# Altium PCB Photogate.PcbDoc
Units mm, origin at the board's own origin, x right, y up, seen from the top; angles counter-clockwise.
Board outline 30.5 x 39.25 mm, 2 copper layers (Top Layer, Bottom Layer), stack 1.621 mm thick; 52 components, 21 nets, 131 pads, 40 vias.
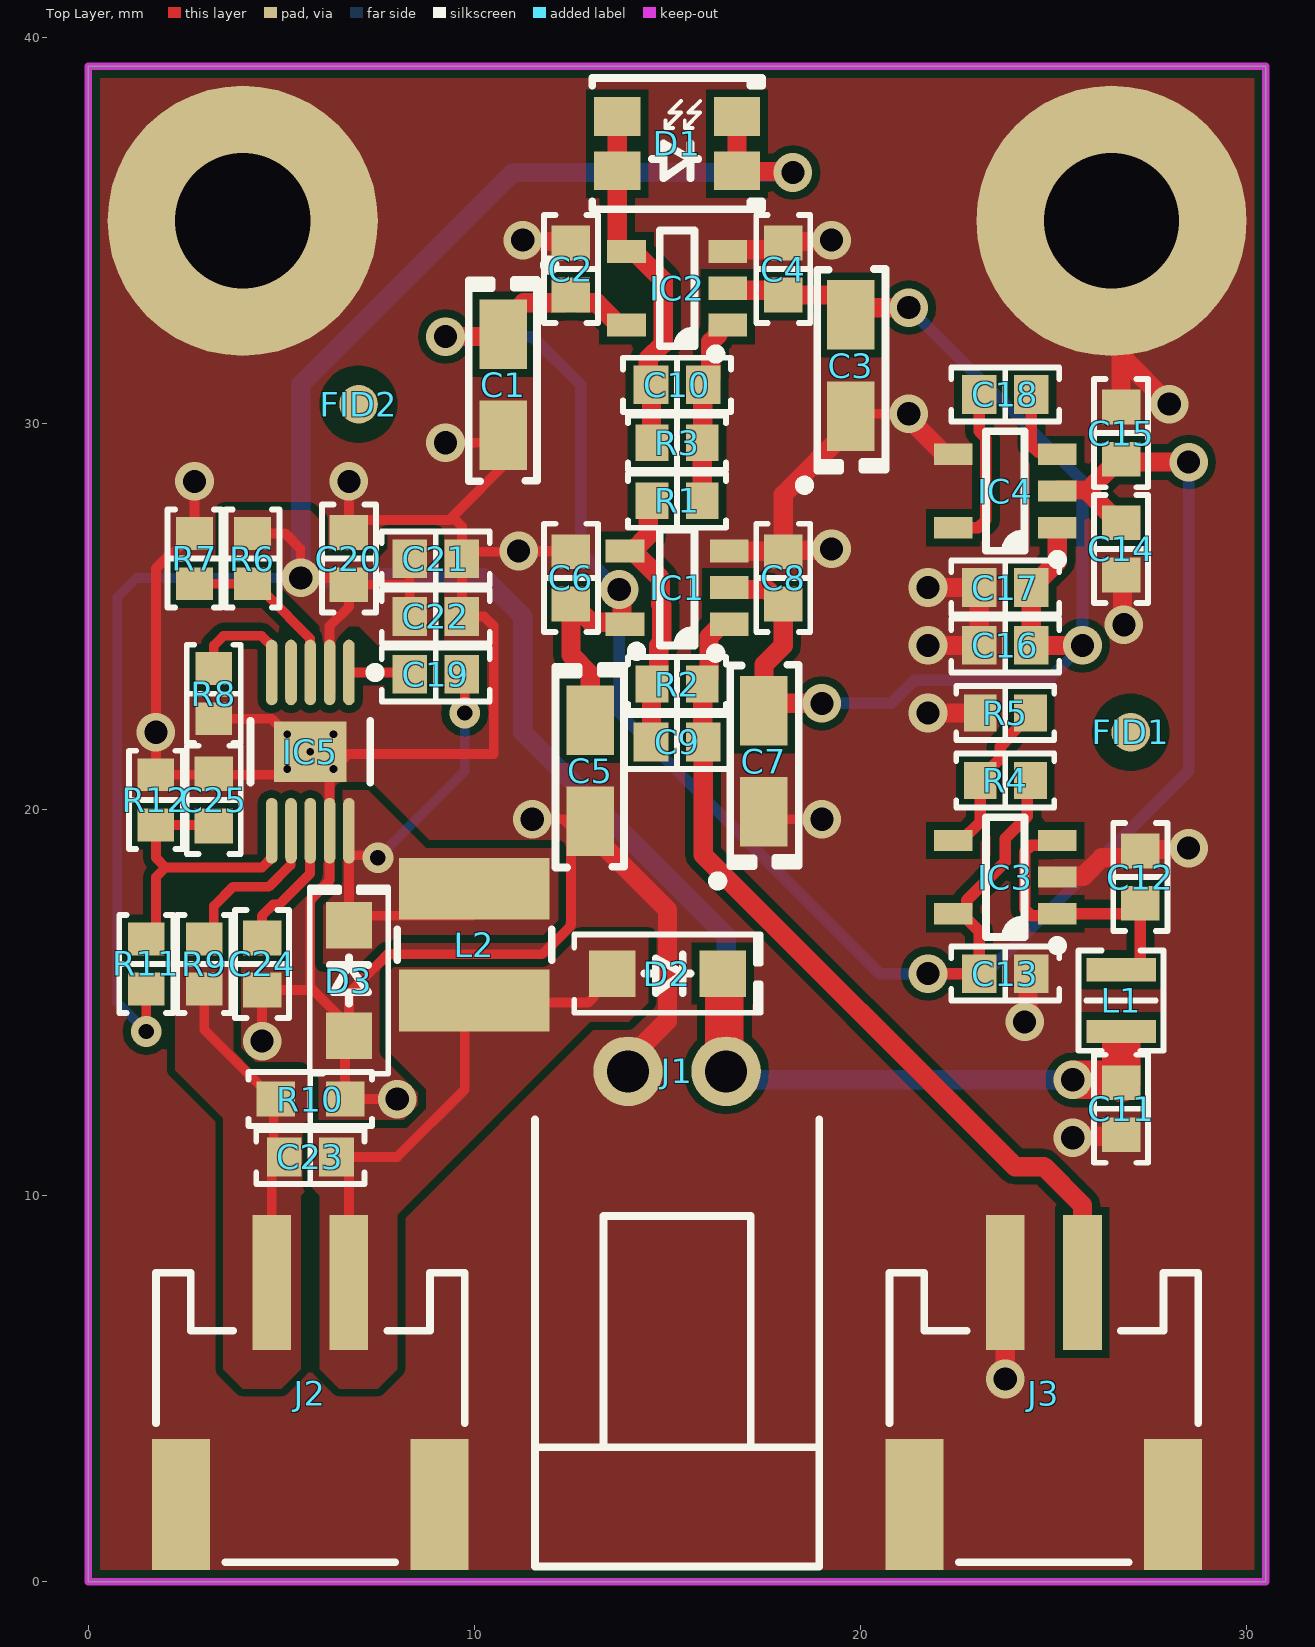
[diagram p0: Top Layer view]
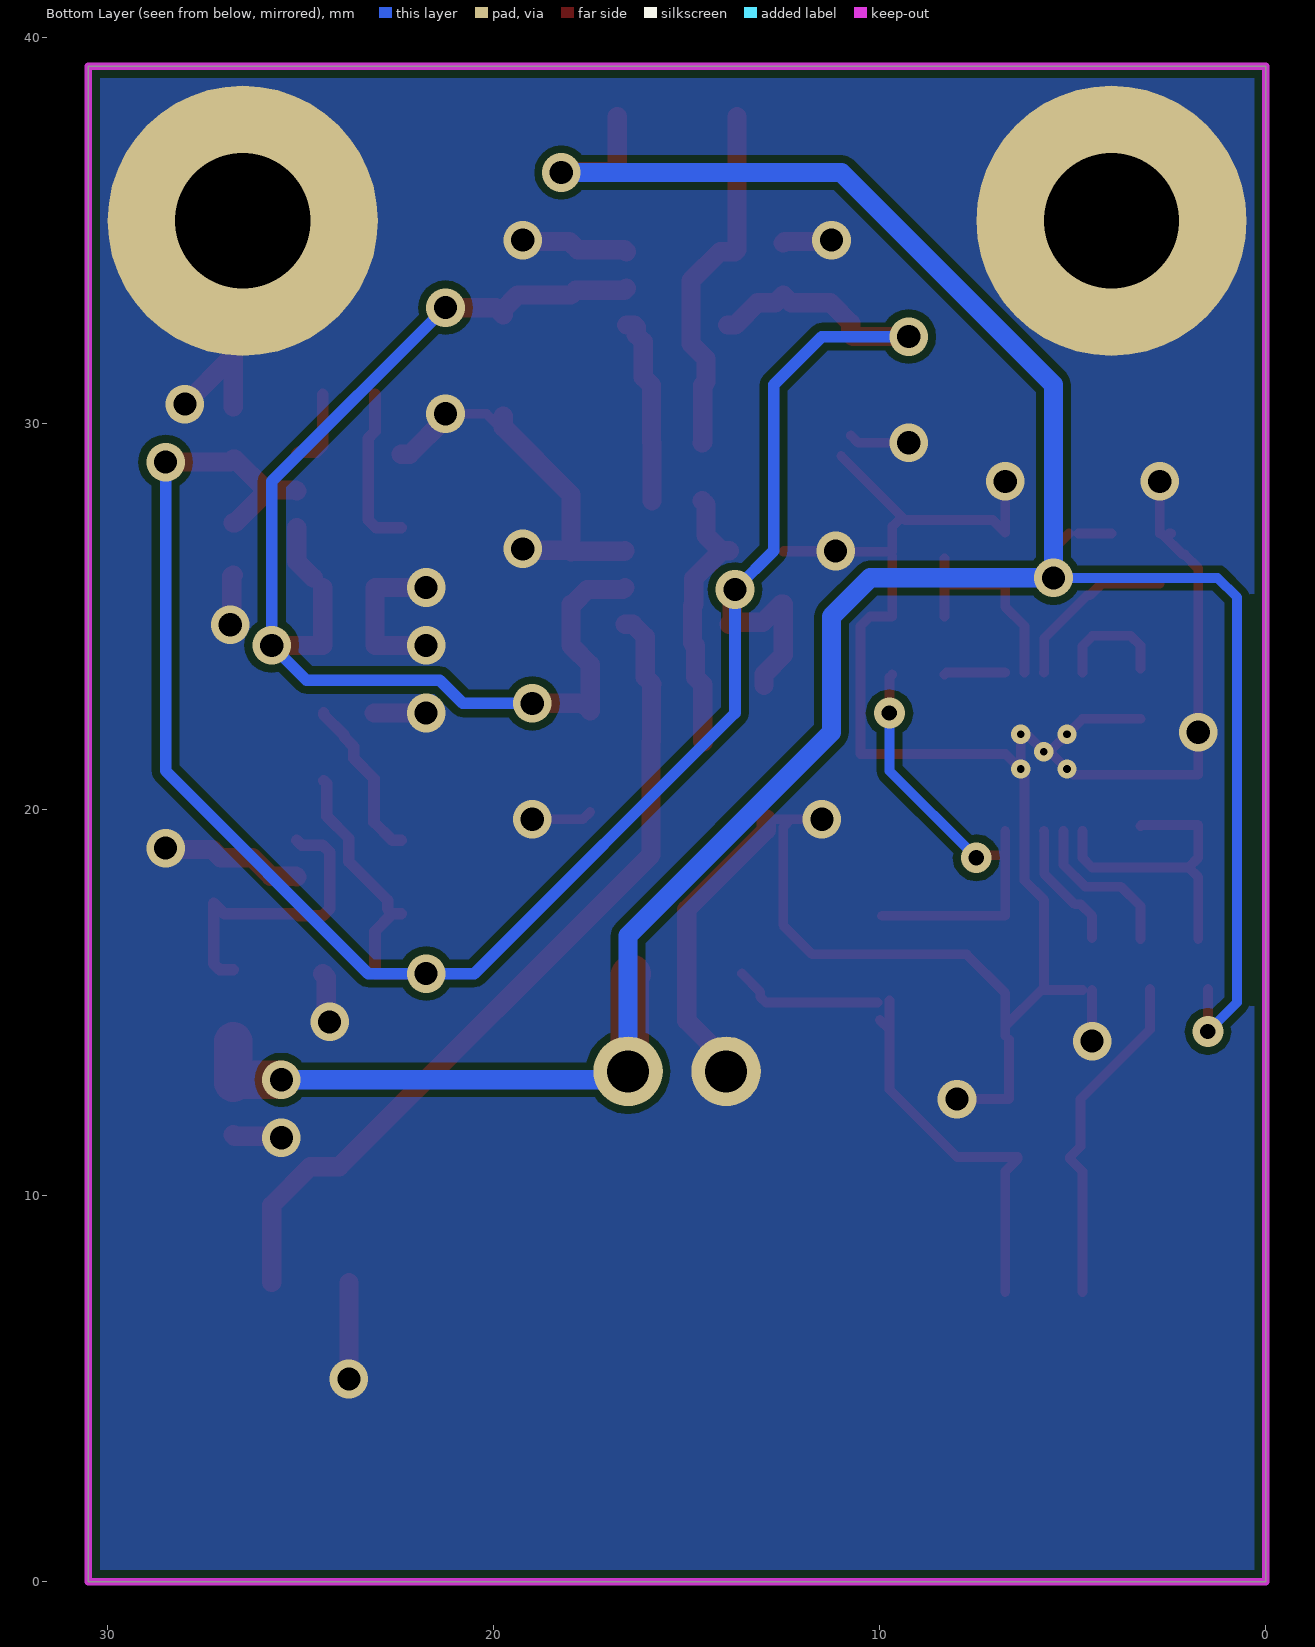
[diagram p1: Bottom Layer view, seen from below]
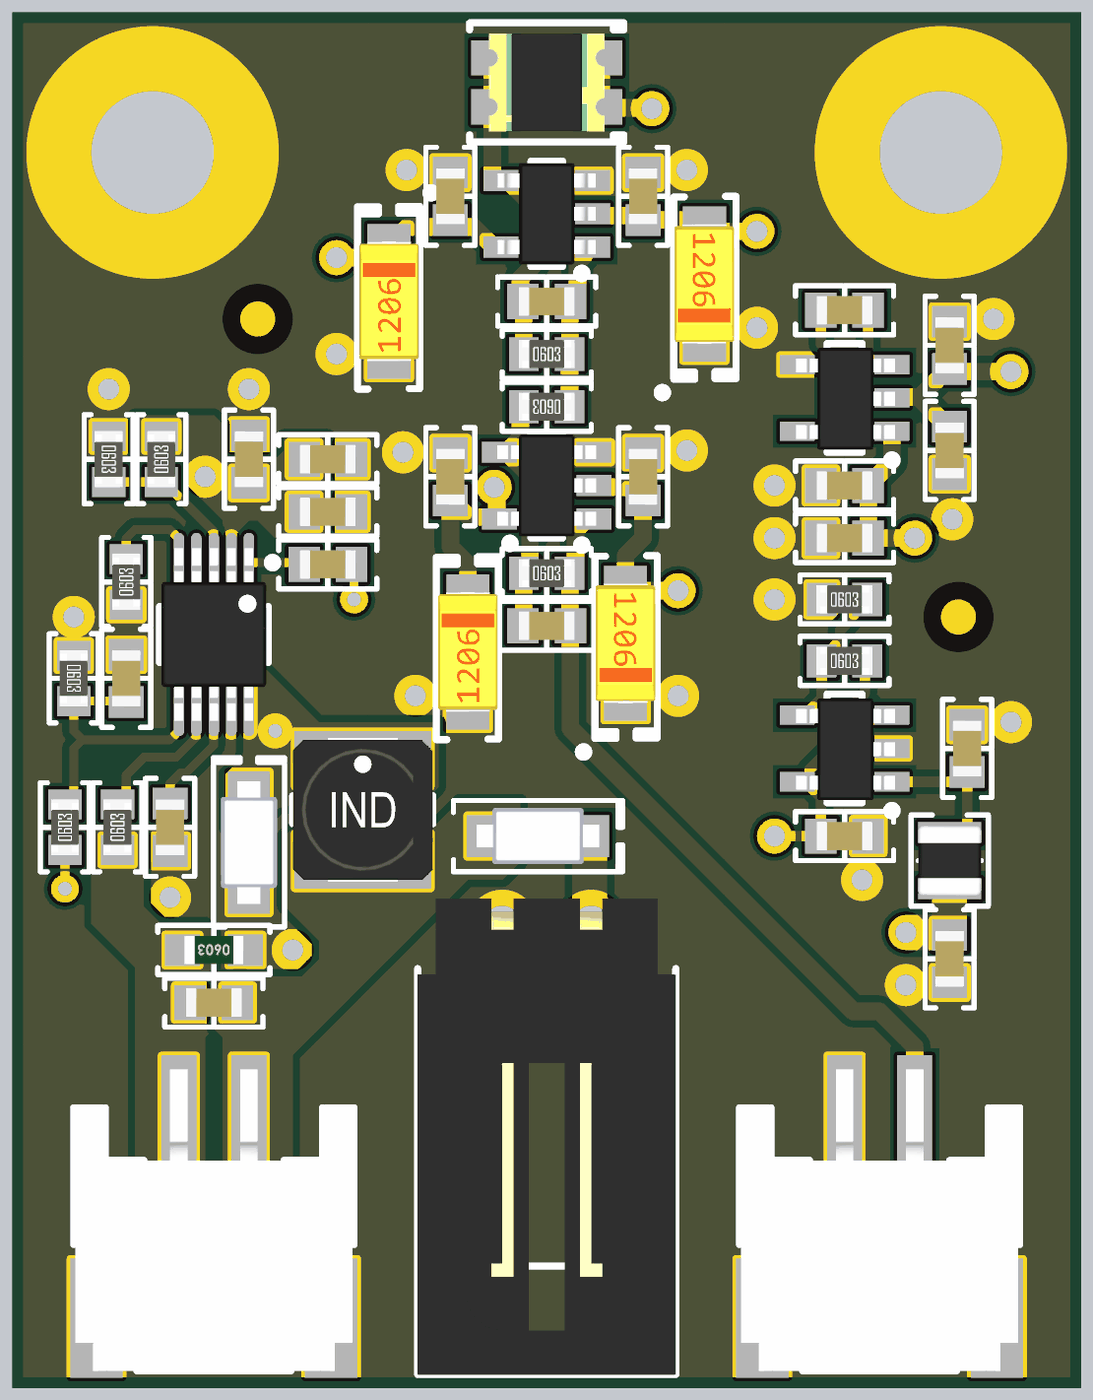
[diagram p2: 3D render of the assembled board from above, using the file's embedded part models]

## Layer stack, top to bottom
Top Solder: solder mask 0.0102, Solder Resist, Dk 3.5
Top Layer: signal copper 0.0356
Dielectric1: core 1.55, FR-4, Dk 4.8
Bottom Layer: signal copper 0.0356
Bottom Solder: solder mask 0.0102, Solder Resist, Dk 3.5

## Board outline
0,0 30.5,0 30.5,39.25 0,39.25

## Design rules (kind name [scope] priority, off if disabled: settings)
Clearance PadClearance [IsPad vs IsPad] p1: gap=0.2 ignorepadtopadclearanceinfootprint=FALSE except(0: Arc-Hole Track-Hole SMDPad-Hole THPad-Hole Via-Hole Fill-Hole Poly-Hole Region-Hole Text-Hole)
Clearance [All] p2: gap=0.2 ignorepadtopadclearanceinfootprint=FALSE except(0: Arc-Hole Track-Hole SMDPad-Hole THPad-Hole Via-Hole Fill-Hole Poly-Hole Region-Hole Text-Hole)
ComponentClearance [All] p1: gap=0.15 collisioncheckmode=3 verticalgap=0.25 showdistances=FALSE
HoleSize [All] p1: absolutevalues=TRUE maxlimit=6 minlimit=0.2 maxpercent=80.000 minpercent=20.000
HoleToHoleClearance [All] p1: gap=0.2 allowstackedmicrovias=TRUE
MinimumAnnularRing [All] p1: minimumring=0.15
MinimumSolderMaskSliver [All] p1: minsoldermaskwidth=0
PolygonConnect ViaConnect [IsVia] p1: connectstyle=Direct reliefconductorwidth=0.254 reliefentries=4 polygonreliefangle="90 Angle" airgapwidth=0.254
PolygonConnect [All] p2: connectstyle=Direct reliefconductorwidth=0.3 reliefentries=4 polygonreliefangle="90 Angle" airgapwidth=0.254
RoutingVias [All] p1: holewidth=0.6 width=1 viastyle="Through Hole" minholewidth=0.4 minwidth=0.8 maxholewidth=5 maxwidth=6
SilkToSilkClearance [All] p1: silktosilkclearance=0
SilkToSolderMaskClearance SilkscreenOverComponentPads [IsPad] p1: minsilkscreentomaskgap=0.05 clearancetoexposedcopper=TRUE
SolderMaskExpansion "Via Tenting" [IsVia] p1: expansion=-2 istentingtop=FALSE
SolderMaskExpansion [All] p2: expansion=0.102 istentingtop=FALSE
Width [All] p1: maxlimit=2 minlimit=0.2 preferedwidth=0.4
24 further rules are at their usual default settings.

## Classes and differential pairs
component class Power: C11 C12 C13 C14 C15 C16 C17 C18 IC3 IC4 L1 R4 R5
component class Photogate: D1 FID1 FID2 J1 J2 J3
component class Driver: C19 C20 C21 C22 C23 C24 C25 D2 D3 IC5 L2 R6 R7 R8 R9 R10 R11 R12
component class Amplifier: C1 C2 C3 C4 C5 C6 C7 C8 C9 C10 IC1 IC2 R1 R2 R3

## Components (designator, comment, footprint, x,y, rotation, side; value= is the part's Value field where it differs from the comment)
C1 "10µF" "CAP POL 1206_3216" 10.75,31 r270 top
C2 "0.1µF" "CAP 0603_1608" 12.5,34 r270 top
C3 "10µF" "CAP POL 1206_3216" 19.75,31.5 r90 top
C4 "0.1µF" "CAP 0603_1608" 18,34 r90 top
C5 "10µF" "CAP POL 1206_3216" 13,21 r270 top
C6 "0.1µF" "CAP 0603_1608" 12.5,26 r270 top
C7 "10µF" "CAP POL 1206_3216" 17.5,21.25 r90 top
C8 "0.1µF" "CAP 0603_1608" 18,26 r90 top
C9 "200pF" "CAP 0603_1608" 15.25,21.75 r0 top
C10 "10pF" "CAP 0603_1608" 15.25,31 r180 top
C11 "1µF" "CAP 0603_1608" 26.75,12.25 r90 top
C12 "1µF" "CAP 0603_1608" 27.25,18.25 r270 top
C13 "4.7µF" "CAP 0603_1608" 23.75,15.75 r180 top
C14 "1µF" "CAP 0603_1608" 26.75,26.75 r90 top
C15 "0.1µF" "CAP 0603_1608" 26.75,29.75 r270 top
C16 "1µF" "CAP 0603_1608" 23.75,24.25 r0 top
C17 "0.1µF" "CAP 0603_1608" 23.75,25.75 r0 top
C18 "1µF" "CAP 0603_1608" 23.75,30.75 r180 top
C19 "0.1µF" "CAP 0603_1608" 9,23.5 r180 top
C20 "1µF" "CAP 0603_1608" 6.75,26.5 r270 top
C21 "1µF" "CAP 0603_1608" 9,26.5 r180 top
C22 "0.01µF" "CAP 0603_1608" 9,25 r180 top
C23 "1µF" "CAP 0603_1608" 5.75,11 r0 top
C24 "0.1µF" "CAP 0603_1608" 4.5,16 r270 top
C25 "0.01µF" "CAP 0603_1608" 3.25,20.25 r270 top
D1 "PD15-22B/TR8" "Everlight PD15-22" 15.25,37.25 r0 top
D2 "MBR120VLSFT3G" SOD123F 15,15.75 r0 top
D3 "MBR120VLSFT3G" SOD123F 6.75,15.57 r90 top
FID1 "Fiducial" Fiducial 27,22 r90 top
FID2 "Fiducial" Fiducial 7,30.5 r90 top
IC1 "AD8061ARTZ-REEL7" "ANALOG SOT-23-5 RJ-5" 15.25,25.75 r180 top
IC2 "AD8615AUJZ-REEL" "ANALOG TSOT-23-5 UJ-5" 15.25,33.5 r180 top
IC3 "TPS76301DBVR" "TI SOT-23-5 DBV" 23.75,18.25 r180 top
IC4 "TPS60403DBVR" "TI SOT-23-5 DBV" 23.75,28.25 r180 top
IC5 "TPS92512DGQR" "TI MSOP-10 DGQ" 5.75,21.5 r270 top
J1 "0705530106" "MOLEX SDA-70553-2PIN" 15.25,7.25 r180 top
J2 "S2B-PH-SM4-TB(LF)(SN)" "JST S2B-PH-SM4-TB" 5.75,3.5 r180 top
J3 "S2B-PH-SM4-TB(LF)(SN)" "JST S2B-PH-SM4-TB" 24.75,3.5 r180 top
L1 "10µH" "IND 0806_2016" 26.75,15.05 r90 top
L2 "22µH" "TDK VLCF4028-2" 10,16.5 r270 top
R1 "105 Ohms" "RES 0603_1608" 15.25,28 r180 top
R2 "221 Ohms" "RES 0603_1608" 15.25,23.25 r0 top
R3 "25.5 kOhms" "RES 0603_1608" 15.25,29.5 r0 top
R4 "223 kOhms" "RES 0603_1608" 23.75,20.75 r0 top
R5 "169 kOhms" "RES 0603_1608" 23.75,22.5 r0 top
R6 "205 kOhms" "RES 0603_1608" 4.25,26.5 r90 top
R7 "28.7 kOhms" "RES 0603_1608" 2.75,26.5 r270 top
R8 "402 kOhms" "RES 0603_1608" 3.25,23 r90 top
R9 "1 kOhms" "RES 0603_1608" 3,16 r90 top
R10 "3 Ohms" "STACKPOLE CSR0603" 5.75,12.5 r180 top
R11 "162 kOhms" "RES 0603_1608" 1.5,16 r90 top
R12 "28.7 kOhms" "RES 0603_1608" 1.75,20.25 r270 top

## Footprints (in the part's own frame and the unit in brackets; to place one, negate y for a bottom-side part, rotate by r counter-clockwise, add the part's x,y. Pads: shape width x height; smd on the part's side, far side on the other; paste and mask are expansions set on the pad)
"ANALOG SOT-23-5 RJ-5" [mm] "SOT23, 5-Leads, Body 2.90x2.80mm, Pitch 0.95mm, IPC Medium Density"
  rect 1x0.6 smd: 1(-1.35,0.95) 2(-1.35,0) 3(-1.35,-0.95) 4(1.35,-0.95) 5(1.35,0.95)
  silkscreen extent -1.13,-1.5 0.45,1.82, body extent -1.41,-1.45 1.41,1.45, height 1.5
"ANALOG TSOT-23-5 UJ-5" [mm] "SOT23, 5-Leads, Body 2.90x1.60mm, Pitch 0.95mm, IPC Medium Density"
  rect 1x0.6 smd: 1(-1.31,0.95) 2(-1.31,0) 3(-1.31,-0.95) 4(1.31,-0.95) 5(1.31,0.95)
  silkscreen extent -1.13,-1.5 0.45,1.82, body extent -1.4,-1.45 1.4,1.45, height 1
"CAP 0603_1608" [mm] "Chip Capacitor, 2-Leads, Body 1.60x0.80mm, IPC Medium Density"
  rect 0.9x1 smd: 1(-0.675,0) 2(0.675,0)
  silkscreen extent -1.4,-0.7 1.4,0.7, body extent -0.8,-0.41 0.8,0.41, height 0.82
"CAP POL 1206_3216" [mm] "Molded Capacitor, 2-Leads, Body 3.20x1.6mm, IPC Medium Density"
  rect 1.8x1.23 smd: 1(-1.31,0) 2(1.31,0)
  silkscreen extent -3.22,-0.9 2.5,1.33, body extent -1.72,-0.85 1.71,0.85, height 1.7
"Everlight PD15-22" [mm] "4-SMD, 4-Leads, Body 3.3x2.8mm, IPC Medium Density"
  rect 1.2x1 smd: 1(-1.55,-0.7) 1(-1.55,0.7) 2(1.55,-0.7) 2(1.55,0.7)
  silkscreen extent -2.2,-1.8 2.2,1.8, body extent -1.65,-1.4 1.65,1.4, height 1.1
Fiducial [mm]
  round 1 smd paste-1 mask+0.5: F(0,0)
  Top Layer pour cut-out: 0,0
  Top Layer pour cut-out: -1,0 -0.924,0.383 -0.707,0.707 -0.383,0.924 0,1 0,1 0.383,0.924 0.707,0.707 0.924,0.383 1,0 1,0 0.924,-0.383 0.707,-0.707 0.383,-0.924 0,-1 0,-1 -0.383,-0.924 -0.707,-0.707 -0.924,-0.383 -1,0
"IND 0806_2016" [mm] "Chip Capacitor, 2-Leads, Body 2.00x1.20mm, IPC Medium Density"
  rect 0.6x1.8 smd: 1(-0.8,0) 2(0.8,0)
  silkscreen extent -1.3,-1.1 1.3,1.1, body extent -1.01,-0.91 1.01,0.91, height 1.81
"JST S2B-PH-SM4-TB" [mm] "JST PH Series 2mm pitch, side entry connector"
  rect 1x3.5 smd: 1(-1,-4.25) 2(1,-4.25)
  rect 1.5x3.4 smd: M(-3.35,1.5) M(3.35,1.5)
  silkscreen extent -4,-4.5 4,3, body extent -3.95,-5.6 3.95,3.01, height 5.6
"MOLEX SDA-70553-2PIN" [mm] "SL Right angle header with latch, 0.100 centres, SDA-70553"
  round 1.8 hole 1.09: 1(-1.27,-5.969) 2(1.27,-5.969)
  silkscreen extent -3.68,-4.72 3.68,6.86, body extent -3.68,-6.72 3.68,6.87, height 6.96
"RES 0603_1608" [mm] "Chip Resistor, 2-Leads, Body 1.60x0.80mm, IPC Medium Density"
  rect 0.85x0.95 smd: 1(-0.65,0) 2(0.65,0)
  silkscreen extent -1.27,-0.7 1.27,0.7, body extent -0.8,-0.4 0.8,0.4, height 0.45
SOD123F [mm] "SODFL, 2-Leads, Body 1.60x3.50mm, IPC Medium Density"
  rect 1.2x1.2 smd: 1(-1.43,0) 2(1.43,0)
  silkscreen extent -2.41,-1.02 2.41,1.02, body extent -1.75,-0.8 1.75,0.8, height 1.1
"STACKPOLE CSR0603" [mm] "Chip Resistor, 2-Leads, Body 1.60x0.80mm, IPC Medium Density"
  rect 1x0.9 smd: 1(-0.9,0) 2(0.9,0)
  silkscreen extent -1.6,-0.7 1.6,0.7, body extent -0.85,-0.4 0.85,0.4, height 0.45
"TDK VLCF4028-2" [mm] "Precision Wire Wound Inductor, 2-Leads, Body 4.00x4.00mm, IPC Medium Density"
  rect 1.6x3.9 smd: 1(-1.45,0) 2(1.45,0)
  silkscreen extent -0.4,-2 0.4,2, body extent -2.05,-2 2.05,2, height 2.81
"TI MSOP-10 DGQ" [mm] "TSSOP, 10-Leads, Body 3x3mm, Pitch 0.5mm, Thermal Pad 1.88x1.57mm, IPC Medium Density"
  oval 1.7x0.3 smd: 1(-2.05,1) 2(-2.05,0.5) 3(-2.05,0) 4(-2.05,-0.5) 5(-2.05,-1) 6(2.05,-1) 7(2.05,-0.5) 8(2.05,0) 9(2.05,0.5) 10(2.05,1)
  rect 1.57x1.88 smd: 11(0,0)
  silkscreen extent -2.17,-1.55 0.8,1.8, body extent -2.46,-1.5 2.46,1.5, height 1.2
"TI SOT-23-5 DBV" [mm] "SOT23, 5-Leads, Body 2.90x2.80mm, Pitch 0.95mm, IPC Medium Density"
  rect 1x0.55 smd: 1(-1.35,0.95) 2(-1.35,0) 3(-1.35,-0.95) 4(1.35,-0.95) 5(1.35,0.95)
  silkscreen extent -1.48,-1.55 0.5,1.9, body extent -1.44,-1.43 1.39,1.48, height 1.5

## Part data
C1 C3 C5 C7: library part T55A106M6R3C0200, "CAP TANT POLY 10UF 6.3V 1206", Device Package="1206 (3216 Metric)", ESR (Equivalent Series Resistance)="200mOhm @ 100kHz", Manufacturer="Vishay Sprague", Manufacturer Size Code=A, Operating Temperature="-55°C ~ 105°C", Supplier Part Number 1=718-1985-1-ND, Tolerance=±20%, Voltage - Rated=6.3V, Capacitance=10µF, ComponentLink1Description=Datasheet, ComponentLink1URL=http://www.vishay.com/docs/40174/t55.pdf, ComponentLink2Description="DigiKey Link", ComponentLink2URL=http://digikey.com/product-detail/en/vishay-sprague/T55A106M6R3C0200/718-1985-1-ND/4989581, Features="General Purpose", Height - Seated (Max)="0.071\" (1.80mm)", LastUpdated="18/01/2020 19:49:33", Lifecycle Status=Active, Minimum Order=1, Mounting Type="Surface Mount", Package / Case="1206 (3216 Metric)", Packaging=TapeAndReel, Part Number=T55A106M6R3C0200, Part Status=Active, PartId=60, Price=0.17, Series="vPolyTan™ T55", Size / Dimension="0.126\" L x 0.063\" W (3.20mm x 1.60mm)", Supplier 1=DigiKey, Type=Molded
C2 C4 C6 C8 C15 C17 C19 C24: library part CC0603MRY5V8BB104, "CAP CER 0.1UF 25V Y5V 0603", Device Package="0603 (1608 Metric)", Manufacturer=Yageo, Operating Temperature="-30°C ~ 85°C", Supplier Part Number 1=311-1363-1-ND, Temperature Coefficient="Y5V (F)", Tolerance=±20%, Voltage - Rated=25V, Applications="General Purpose", Capacitance=0.1µF, ComponentLink1Description=Datasheet, ComponentLink1URL=http://www.yageo.com/documents/recent/UPY-GPHC_Y5V_6.3V-to-50V_8.pdf, ComponentLink2Description="DigiKey Link", ComponentLink2URL=http://digikey.com/product-detail/en/yageo/CC0603MRY5V8BB104/311-1363-1-ND/2103147, LastUpdated="18/01/2020 19:39:01", Lifecycle Status=Active, Minimum Order=1, Mounting Type="Surface Mount, MLCC", Package / Case="0603 (1608 Metric)", Packaging=TapeAndReel, Part Number=CC0603MRY5V8BB104, Part Status=Active, PartId=5132, Price=0.01, Series=CC, Size / Dimension="0.063\" L x 0.031\" W (1.60mm x 0.80mm)", Supplier 1=DigiKey, Thickness (Max)="0.035\" (0.90mm)"
C9: library part CC0603KRX7R9BB201, "CAP CER 200PF 50V X7R 0603", Device Package="0603 (1608 Metric)", Manufacturer=Yageo, Operating Temperature="-55°C ~ 125°C", Supplier Part Number 1=311-4097-1-ND, Temperature Coefficient=X7R, Tolerance=±10%, Voltage - Rated=50V, Applications="General Purpose", Capacitance=200pF, ComponentLink1Description=Datasheet, ComponentLink1URL=https://www.yageo.com/upload/media/product/productsearch/datasheet/mlcc/UPY-GPHC_X7R_6.3V-to-50V_18.pdf, ComponentLink2Description="DigiKey Link", ComponentLink2URL=http://digikey.com/product-detail/en/yageo/CC0603KRX7R9BB201/311-4097-1-ND/8025186, LastUpdated="18/01/2020 19:38:59", Lifecycle Status=Active, Minimum Order=1, Mounting Type="Surface Mount, MLCC", Package / Case="0603 (1608 Metric)", Packaging=TapeAndReel, Part Number=CC0603KRX7R9BB201, Part Status=Active, PartId=7876, Price=0.01, Series=CC, Size / Dimension="0.063\" L x 0.031\" W (1.60mm x 0.80mm)", Supplier 1=DigiKey, Thickness (Max)="0.035\" (0.90mm)"
C10: library part 06035A100JAT2A, "CAP CER 10PF 50V C0G/NP0 0603", Device Package="0603 (1608 Metric)", Manufacturer="AVX Corporation", Operating Temperature="-55°C ~ 125°C", Supplier Part Number 1=478-1163-1-ND, Temperature Coefficient="C0G, NP0", Tolerance=±5%, Voltage - Rated=50V, Applications="General Purpose", Capacitance=10pF, ComponentLink1Description=Datasheet, ComponentLink1URL=http://datasheets.avx.com/C0GNP0-Dielectric.pdf, ComponentLink2Description="DigiKey Link", ComponentLink2URL=http://digikey.com/product-detail/en/avx-corporation/06035A100JAT2A/478-1163-1-ND/564195, LastUpdated="18/01/2020 19:39:01", Lifecycle Status=Active, Minimum Order=1, Mounting Type="Surface Mount, MLCC", Package / Case="0603 (1608 Metric)", Packaging=TapeAndReel, Part Number=06035A100JAT2A, Part Status=Active, PartId=5565, Price=0.01, Series=-, Size / Dimension="0.063\" L x 0.032\" W (1.60mm x 0.81mm)", Supplier 1=DigiKey, Thickness (Max)="0.035\" (0.90mm)"
C11 C12 C14 C16 C18 C20 C21 C23: library part CC0603KRX5R8BB105, "CAP CER 1UF 25V X5R 0603", Device Package="0603 (1608 Metric)", Manufacturer=Yageo, Operating Temperature="-55°C ~ 85°C", Supplier Part Number 1=311-1445-1-ND, Temperature Coefficient=X5R, Tolerance=±10%, Voltage - Rated=25V, Applications="General Purpose", Capacitance=1µF, ComponentLink1Description=Datasheet, ComponentLink1URL=https://www.yageo.com/upload/media/product/productsearch/datasheet/mlcc/UPY-GPHC_X5R_4V-to-50V_25.pdf, ComponentLink2Description="DigiKey Link", ComponentLink2URL=http://digikey.com/product-detail/en/yageo/CC0603KRX5R8BB105/311-1445-1-ND/2833751, LastUpdated="18/01/2020 19:39:01", Lifecycle Status=Active, Minimum Order=1, Mounting Type="Surface Mount, MLCC", Package / Case="0603 (1608 Metric)", Packaging=TapeAndReel, Part Number=CC0603KRX5R8BB105, Part Status=Active, PartId=5146, Price=0.01, Series=CC, Size / Dimension="0.063\" L x 0.031\" W (1.60mm x 0.80mm)", Supplier 1=DigiKey, Thickness (Max)="0.035\" (0.90mm)"
C13: library part CL10A475MQ8NNNC, "CAP CER 4.7UF 6.3V X5R 0603", Device Package="0603 (1608 Metric)", Manufacturer="Samsung Electro-Mechanics", Operating Temperature="-55°C ~ 85°C", Supplier Part Number 1=1276-1907-1-ND, Temperature Coefficient=X5R, Tolerance=±20%, Voltage - Rated=6.3V, Applications="General Purpose", Capacitance=4.7µF, ComponentLink1Description=Datasheet, ComponentLink1URL=http://www.samsungsem.com/kr/support/product-search/mlcc/CL10A475MQ8NNNC.jsp, ComponentLink2Description="DigiKey Link", ComponentLink2URL=http://digikey.com/product-detail/en/samsung-electro-mechanics/CL10A475MQ8NNNC/1276-1907-1-ND/3889993, LastUpdated="18/01/2020 19:39:01", Lifecycle Status=Active, Minimum Order=1, Mounting Type="Surface Mount, MLCC", Package / Case="0603 (1608 Metric)", Packaging=TapeAndReel, Part Number=CL10A475MQ8NNNC, Part Status=Active, PartId=5537, Price=0.01, Series=CL, Size / Dimension="0.063\" L x 0.031\" W (1.60mm x 0.80mm)", Supplier 1=DigiKey, Thickness (Max)="0.035\" (0.90mm)"
C22 C25: library part C0603C103KARACAUTO, "CAP CER 0.01UF 250V X7R 0603", Device Package="0603 (1608 Metric)", Manufacturer=KEMET, Operating Temperature="-55°C ~ 125°C", Ratings=AEC-Q200, Supplier Part Number 1=399-17960-1-ND, Temperature Coefficient=X7R, Tolerance=±10%, Voltage - Rated=250V, Applications="Automotive, Bypass, Decoupling", Capacitance=0.01µF, ComponentLink1Description=Datasheet, ComponentLink1URL=https://api.kemet.com/component-edge/download/datasheet/C0603C103KARACAUTO.pdf, ComponentLink2Description="DigiKey Link", ComponentLink2URL=http://digikey.com/product-detail/en/kemet/C0603C103KARACAUTO/399-17960-1-ND/9084030, LastUpdated="19/01/2020 00:01:34", Lifecycle Status=Active, Minimum Order=1, Mounting Type="Surface Mount, MLCC", Package / Case="0603 (1608 Metric)", Packaging=TapeAndReel, Part Number=C0603C103KARACAUTO, Part Status=Active, PartId=15195, Price=0.26, Series="SMD Auto X7R", Size / Dimension="0.063\" L x 0.031\" W (1.60mm x 0.80mm)", Supplier 1=DigiKey, Thickness (Max)="0.034\" (0.87mm)"
D1: "SENSOR PHOTODIODE 940NM 4SMD", Current - Dark (Typ)=10nA, Device Package="4-SMD, No Lead", Manufacturer="Everlight Electronics Co Ltd", Operating Temperature="-40°C ~ 85°C", Supplier Part Number 1=1080-1366-2-ND, Voltage - DC Reverse (Vr) (Max)=32V, ComponentLink1Description=Datasheet, ComponentLink1URL=//media.digikey.com/pdf/Data%20Sheets/Everlight%20PDFs/PD15-22B_TR8.pdf, ComponentLink2Description="DigiKey Link", ComponentLink2URL=//digikey.com/product-detail/en/everlight-electronics-co-ltd/PD15-22B-TR8/1080-1366-2-ND/2675857, Diode Type=PIN, LastUpdated="09/12/2019 02:27:51", Lifecycle Status=0, Minimum Order=1, Mounting Type="Surface Mount", Package / Case="4-SMD, No Lead", Packaging=TapeAndReel, Part Number=PD15-22B/TR8, Part Status=Active, Price=0.13, Response Time=10ns, Series=-, Spectral Range="730nm ~ 1100nm", Supplier 1=DigiKey, Wavelength=940nm
D2 D3: "DIODE SCHOTTKY 20V 1A SOD123FL", Current - Average Rectified (Io)=1A, Current - Reverse Leakage @ Vr="600µA @ 20V", Device Package=SOD-123F, Manufacturer="ON Semiconductor", Operating Temperature - Junction="-65°C ~ 125°C", Supplier Device Package=SOD-123FL, Supplier Part Number 1=MBR120VLSFT3GOSCT-ND, Voltage - DC Reverse (Vr) (Max)=20V, Voltage - Forward (Vf) (Max) @ If="340mV @ 1A", ComponentLink1Description=Datasheet, ComponentLink1URL=http://www.onsemi.com/pub/Collateral/MBR120VLSFT1-D.PDF, ComponentLink2Description="DigiKey Link", ComponentLink2URL=http://digikey.com/product-detail/en/on-semiconductor/MBR120VLSFT3G/MBR120VLSFT3GOSCT-ND/3487322, Diode Type=Schottky, LastUpdated="19/01/2020 00:13:23", Lifecycle Status=Active, Minimum Order=1, Mounting Type="Surface Mount", Package / Case=SOD-123F, Packaging=TapeAndReel, Part Number=MBR120VLSFT3G, Part Status=Active, PartId=2404, Price=0.09, Series=-, Speed="Fast Recovery =< 500ns, > 200mA (Io)", Supplier 1=DigiKey
IC1: "IC OPAMP VFB 1 CIRCUIT SOT23-5", Current - Input Bias=3.5µA, Current - Output / Channel=50mA, Current - Supply=6.8mA, Device Package="SC-74A, SOT-753", Manufacturer="Analog Devices Inc.", Operating Temperature="-40°C ~ 85°C", Supplier Device Package=SOT-23-5, Supplier Part Number 1=AD8061ARTZ-REEL7TR-ND, Voltage - Input Offset=1mV, Voltage - Supply, Single/Dual (±)="2.7V ~ 8V, ±1.35V ~ 4V", -3db Bandwidth=320MHz, Amplifier Type="Voltage Feedback", ComponentLink1Description=Datasheet, ComponentLink1URL=https://www.analog.com/media/en/technical-documentation/data-sheets/AD8061_8062_8063.pdf, ComponentLink2Description="DigiKey Link", ComponentLink2URL=//digikey.com/product-detail/en/analog-devices-inc/AD8061ARTZ-REEL7/AD8061ARTZ-REEL7TR-ND/620697, LastUpdated="04/12/2019 13:13:27", Lifecycle Status=0, Minimum Order=1, Mounting Type="Surface Mount", Number of Circuits=1, Output Type=Rail-to-Rail, Package / Case="SC-74A, SOT-753", Packaging=TapeAndReel, Part Number=AD8061ARTZ-REEL7, Part Status=Active, PartId=1, Price=1.05, Series=-, Slew Rate=650V/µs, Supplier 1=DigiKey
IC2: "IC OPAMP GP 1 CIRCUIT TSOT23-5", Current - Input Bias=0.2pA, Current - Output / Channel=150mA, Current - Supply=1.7mA, Device Package="SOT-23-5 Thin, TSOT-23-5", Manufacturer="Analog Devices Inc.", Operating Temperature="-40°C ~ 125°C", Supplier Device Package=TSOT-23-5, Supplier Part Number 1=AD8615AUJZ-REELTR-ND, Voltage - Input Offset=23µV, Voltage - Supply, Single/Dual (±)="2.7V ~ 5.5V, ±1.35V ~ 2.75V", Amplifier Type="General Purpose", ComponentLink1Description=Datasheet, ComponentLink1URL=https://www.analog.com/media/en/technical-documentation/data-sheets/AD8615_8616_8618.pdf, ComponentLink2Description="DigiKey Link", ComponentLink2URL=//digikey.com/product-detail/en/analog-devices-inc/AD8615AUJZ-REEL/AD8615AUJZ-REELTR-ND/993826, Gain Bandwidth Product=24MHz, LastUpdated="09/12/2019 02:06:44", Lifecycle Status=0, Minimum Order=1, Mounting Type="Surface Mount", Number of Circuits=1, Output Type=Rail-to-Rail, Package / Case="SOT-23-5 Thin, TSOT-23-5", Packaging=TapeAndReel, Part Number=AD8615AUJZ-REEL, Part Status=Active, PartId=5, Price=1.06, Series=DigiTrim®, Slew Rate=12V/µs, Supplier 1=DigiKey
IC3: "IC REG LIN POS ADJ 150MA SOT23-5", Current - Output=150mA, Current - Quiescent (Iq)=100µA, Current - Supply (Max)=140µA, Device Package="SC-74A, SOT-753", Manufacturer="Texas Instruments", Operating Temperature="-40°C ~ 125°C", Supplier Device Package=SOT-23-5, Supplier Part Number 1=296-11014-1-ND, Voltage - Input (Max)=10V, Voltage - Output (Max)=6.5V, Voltage - Output (Min/Fixed)=1.5V, ComponentLink1Description=Datasheet, ComponentLink1URL=http://www.ti.com/general/docs/suppproductinfo.tsp?distId=10&gotoUrl=http%3A%2F%2Fwww.ti.com%2Flit%2Fgpn%2Ftps763, ComponentLink2Description="DigiKey Link", ComponentLink2URL=http://digikey.com/product-detail/en/texas-instruments/TPS76301DBVR/296-11014-1-ND/477331, Control Features=Enable, LastUpdated="18/01/2020 20:02:45", Lifecycle Status=Active, Minimum Order=1, Mounting Type="Surface Mount", Number of Regulators=1, Output Configuration=Positive, Output Type=Adjustable, Package / Case="SC-74A, SOT-753", Packaging=TapeAndReel, Part Number=TPS76301DBVR, Part Status=Active, Price=0.33, Protection Features="Over Current, Over Temperature, Reverse Polarity", PSRR="60dB (1kHz)", Series=-, Supplier 1=DigiKey
IC4: "IC REG CHARG PUMP INV 60MA SOT23", Current - Output=60mA, Device Package="SC-74A, SOT-753", Frequency - Switching=250kHz, Manufacturer="Texas Instruments", Operating Temperature="-40°C ~ 125°C (TJ)", Supplier Device Package=SOT-23-5, Supplier Part Number 1=296-27005-1-ND, Voltage - Input (Max)=5.25V, Voltage - Input (Min)=1.8V, Voltage - Output (Min/Fixed)="-Vin, 2Vin, Vin/2", ComponentLink1Description=Datasheet, ComponentLink1URL=http://www.ti.com/general/docs/suppproductinfo.tsp?distId=10&gotoUrl=http%3A%2F%2Fwww.ti.com%2Flit%2Fgpn%2Ftps60400, ComponentLink2Description="DigiKey Link", ComponentLink2URL=http://digikey.com/product-detail/en/texas-instruments/TPS60403DBVR/296-27005-1-ND/2255295, Function=Ratiometric, LastUpdated="18/01/2020 19:41:57", Lifecycle Status=Active, Minimum Order=1, Mounting Type="Surface Mount", Number of Outputs=1, Output Configuration="Positive or Negative", Output Type=Fixed, Package / Case="SC-74A, SOT-753", Packaging=TapeAndReel, Part Number=TPS60403DBVR, Part Status=Active, Price=0.41, Series=-, Supplier 1=DigiKey, Synchronous Rectifier=No, Topology="Charge Pump"
IC5: "IC LED CNV CONST CUR 2.5A 10MSOP", Current - Output / Channel="2.5A (Switch)", Device Package="10-TFSOP, 10-MSOP (0.118\", 3.00mm Width) Exposed Pad", Frequency=2MHz, Manufacturer="Texas Instruments", Operating Temperature="-40°C ~ 125°C (TJ)", Supplier Device Package=10-MSOP-PowerPad, Supplier Part Number 1=296-41002-1-ND, Voltage - Output=45V, Voltage - Supply (Max)=42V, Voltage - Supply (Min)=4.5V, Applications=Lighting, ComponentLink1Description=Datasheet, ComponentLink1URL=http://www.ti.com/general/docs/suppproductinfo.tsp?distId=10&gotoUrl=http%3A%2F%2Fwww.ti.com%2Flit%2Fgpn%2Ftps92512, ComponentLink2Description="DigiKey Link", ComponentLink2URL=http://digikey.com/product-detail/en/texas-instruments/TPS92512DGQR/296-41002-1-ND/5178879, Dimming=PWM, Internal Switch(s)=Yes, LastUpdated="18/01/2020 21:08:44", Lifecycle Status=Active, Minimum Order=1, Mounting Type="Surface Mount", Number of Outputs=1, Package / Case="10-TFSOP, 10-MSOP (0.118\", 3.00mm Width) Exposed Pad", Packaging=TapeAndReel, Part Number=TPS92512DGQR, Part Status=Active, PartId=7, Price=0.53, Series=-, Supplier 1=DigiKey, Topology="Step-Down (Buck)", Type="DC DC Regulator"
J1: "CONN HEADER R/A 2POS 2.54MM", Insulation Color=Black, Manufacturer=Molex, Material Flammability Rating="UL94 V-0", Operating Temperature="-40°C ~ 105°C", Supplier Part Number 1=WM4153-ND, Voltage Rating=250V, ComponentLink1Description=Datasheet, ComponentLink1URL=https://www.molex.com/pdm_docs/sd/705530106_sd.pdf, ComponentLink2Description="DigiKey Link", ComponentLink2URL=http://digikey.com/product-detail/en/molex/0705530106/WM4153-ND/1643386, Connector Type=Header, Contact Finish - Mating=Gold, Contact Finish - Post=Tin, Contact Finish Thickness - Mating="30.0µin (0.76µm)", Contact Length - Mating="0.240\" (6.10mm)", Contact Length - Post="0.130\" (3.30mm)", Contact Material="Phosphor Bronze", Contact Shape=Square, Contact Type="Male Pin", Fastening Type="Latch Holder", Insulation Height="0.215\" (5.45mm)", Insulation Material="Polyester, Glass Filled", LastUpdated="12/01/2020 23:55:40", Lifecycle Status=Active, Minimum Order=1, Mounting Type="Through Hole, Right Angle", Number of Positions=2, Number of Positions Loaded=All, Number of Rows=1, Packaging=Tube, Part Number=0705530106, Part Status=Active, PartId=85, Pitch - Mating="0.100\" (2.54mm)", Price=1.38, Series="SL 70553", Shrouding="Shrouded - 4 Wall", Style="Board to Cable/Wire", Supplier 1=DigiKey, Termination=Solder
J2 J3: "CONN HEADER SMD R/A 2POS 2MM", Current Rating (Amps)=2A, Insulation Color=Natural, Manufacturer="JST Sales America Inc.", Material Flammability Rating="UL94 V-0", Operating Temperature="-25°C ~ 85°C", Supplier Part Number 1=455-1749-1-ND, Voltage Rating=100V, ComponentLink1Description=Datasheet, ComponentLink1URL=http://www.jst-mfg.com/product/pdf/eng/ePH.pdf, ComponentLink2Description="DigiKey Link", ComponentLink2URL=http://digikey.com/product-detail/en/jst-sales-america-inc/S2B-PH-SM4-TB-LF-SN/455-1749-1-ND/926846, Connector Type=Header, Contact Finish - Mating=Tin, Contact Finish - Post=Tin, Contact Length - Mating="0.130\" (3.30mm)", Contact Material="Copper Alloy", Contact Shape=Square, Contact Type="Male Pin", Fastening Type="Detent Lock", Features="Solder Retention", Insulation Height="0.217\" (5.51mm)", Insulation Material="Polyamide (PA6T), Nylon 6T", LastUpdated="15/01/2020 03:45:11", Lifecycle Status=Active, Minimum Order=1, Mounting Type="Surface Mount, Right Angle", Number of Positions=2, Number of Positions Loaded=All, Number of Rows=1, Packaging=TapeAndReel, Part Number=S2B-PH-SM4-TB(LF)(SN), Part Status=Active, PartId=115, Pitch - Mating="0.079\" (2.00mm)", Price=0.27, Series=PH, Shrouding="Shrouded - 4 Wall", Style="Board to Cable/Wire", Supplier 1=DigiKey, Termination=Solder
L1: library part LBC2016T100K, "FIXED IND 10UH 245MA 820 MOHM", Current Rating (Amps)=245mA, DC Resistance (DCR)=820mOhm, Device Package="0806 (2016 Metric)", Frequency - Self Resonant=32MHz, Inductance Frequency - Test=2.52MHz, Manufacturer="Taiyo Yuden", Operating Temperature="-40°C ~ 105°C", Supplier Part Number 1=587-2536-1-ND, Tolerance=±10%, ComponentLink1Description=Datasheet, ComponentLink1URL="https://ds.yuden.co.jp/TYCOMPAS/ut/detail?pn=LBC2016T100K  &u=M", ComponentLink2Description="DigiKey Link", ComponentLink2URL=http://digikey.com/product-detail/en/taiyo-yuden/LBC2016T100K/587-2536-1-ND/2230402, Height - Seated (Max)="0.071\" (1.80mm)", Inductance=10µH, LastUpdated="18/01/2020 19:58:57", Lifecycle Status=Active, Material - Core="0806 (2016 Metric)", Minimum Order=1, Mounting Type="Surface Mount", Package / Case="0806 (2016 Metric)", Packaging=TapeAndReel, Part Number=LBC2016T100K, Part Status=Active, PartId=3165, Price=0.07, Series="LB, C Type", Shielding=Unshielded, Size / Dimension="0.079\" L x 0.063\" W (2.00mm x 1.60mm)", Supplier 1=DigiKey, Supplier Device Package="0806 (2016 Metric)", Type=Wirewound
L2: library part VLCF5028T-220MR71-2, "FIXED IND 22UH 710MA 140 MOHM", Current - Saturation=710mA, DC Resistance (DCR)="140mOhm Max", Device Package=Nonstandard, Inductance Frequency - Test=100kHz, Manufacturer="TDK Corporation", Operating Temperature="-40°C ~ 105°C", Supplier Part Number 1=445-6559-1-ND, Tolerance=±20%, ComponentLink1Description=Datasheet, ComponentLink1URL=https://product.tdk.com/info/en/catalog/datasheets/inductor_commercial_power_vlcf5028-2_en.pdf?ref_disty=digikey, ComponentLink2Description="DigiKey Link", ComponentLink2URL=http://digikey.com/product-detail/en/tdk-corporation/VLCF5028T-220MR71-2/445-6559-1-ND/2465865, Current Rating (Amps)=710mA, Height - Seated (Max)="0.110\" (2.80mm)", Inductance=22µH, LastUpdated="18/01/2020 19:56:07", Lifecycle Status=Active, Material - Core=Ferrite, Minimum Order=1, Mounting Type="Surface Mount", Package / Case=Nonstandard, Packaging=TapeAndReel, Part Number=VLCF5028T-220MR71-2, Part Status=Active, PartId=188, Price=0.63, Series=VLCF, Shielding=Shielded, Size / Dimension="0.197\" L x 0.197\" W (5.00mm x 5.00mm)", Supplier 1=DigiKey, Type=Wirewound
R1: library part ERJ-3EKF1050V, "RES SMD 105 OHM 1% 1/10W 0603", Device Package="0603 (1608 Metric)", Manufacturer="Panasonic Electronic Components", Operating Temperature="-55°C ~ 155°C", Power (Watts)="0.1W, 1/10W", Ratings=AEC-Q200, Supplier Device Package=0603, Supplier Part Number 1=P105HCT-ND, Temperature Coefficient=±100ppm/°C, Tolerance=±1%, ComponentLink1Description=Datasheet, ComponentLink1URL=https://industrial.panasonic.com/cdbs/www-data/pdf/RDA0000/AOA0000C304.pdf, ComponentLink2Description="DigiKey Link", ComponentLink2URL=http://digikey.com/product-detail/en/panasonic-electronic-components/ERJ-3EKF1050V/P105HCT-ND/198114, Composition="Thick Film", Features="Automotive AEC-Q200", Height - Seated (Max)="0.022\" (0.55mm)", LastUpdated="18/01/2020 10:14:10", Lifecycle Status=Active, Minimum Order=1, Number of Terminations=2, Package / Case="0603 (1608 Metric)", Packaging=TapeAndReel, Part Number=ERJ-3EKF1050V, Part Status=Active, PartId=26060, Price=0.01, Resistance="105 Ohms", Series=ERJ, Size / Dimension="0.063\" L x 0.031\" W (1.60mm x 0.80mm)", Supplier 1=DigiKey
R2: library part ERJ-3EKF2210V, "RES SMD 221 OHM 1% 1/10W 0603", Device Package="0603 (1608 Metric)", Manufacturer="Panasonic Electronic Components", Operating Temperature="-55°C ~ 155°C", Power (Watts)="0.1W, 1/10W", Ratings=AEC-Q200, Supplier Device Package=0603, Supplier Part Number 1=P221HCT-ND, Temperature Coefficient=±100ppm/°C, Tolerance=±1%, ComponentLink1Description=Datasheet, ComponentLink1URL=https://industrial.panasonic.com/cdbs/www-data/pdf/RDA0000/AOA0000C304.pdf, ComponentLink2Description="DigiKey Link", ComponentLink2URL=http://digikey.com/product-detail/en/panasonic-electronic-components/ERJ-3EKF2210V/P221HCT-ND/198256, Composition="Thick Film", Features="Automotive AEC-Q200", Height - Seated (Max)="0.022\" (0.55mm)", LastUpdated="18/01/2020 10:14:23", Lifecycle Status=Active, Minimum Order=1, Number of Terminations=2, Package / Case="0603 (1608 Metric)", Packaging=TapeAndReel, Part Number=ERJ-3EKF2210V, Part Status=Active, PartId=23103, Price=0.01, Resistance="221 Ohms", Series=ERJ, Size / Dimension="0.063\" L x 0.031\" W (1.60mm x 0.80mm)", Supplier 1=DigiKey
R3: library part ERJ-3EKF2552V, "RES SMD 25.5K OHM 1% 1/10W 0603", Device Package="0603 (1608 Metric)", Manufacturer="Panasonic Electronic Components", Operating Temperature="-55°C ~ 155°C", Power (Watts)="0.1W, 1/10W", Ratings=AEC-Q200, Supplier Device Package=0603, Supplier Part Number 1=P25.5KHCT-ND, Temperature Coefficient=±100ppm/°C, Tolerance=±1%, ComponentLink1Description=Datasheet, ComponentLink1URL=https://industrial.panasonic.com/cdbs/www-data/pdf/RDA0000/AOA0000C304.pdf, ComponentLink2Description="DigiKey Link", ComponentLink2URL=http://digikey.com/product-detail/en/panasonic-electronic-components/ERJ-3EKF2552V/P25.5KHCT-ND/198277, Composition="Thick Film", Features="Automotive AEC-Q200", Height - Seated (Max)="0.022\" (0.55mm)", LastUpdated="18/01/2020 10:14:18", Lifecycle Status=Active, Minimum Order=1, Number of Terminations=2, Package / Case="0603 (1608 Metric)", Packaging=TapeAndReel, Part Number=ERJ-3EKF2552V, Part Status=Active, PartId=24051, Price=0.01, Resistance="25.5 kOhms", Series=ERJ, Size / Dimension="0.063\" L x 0.031\" W (1.60mm x 0.80mm)", Supplier 1=DigiKey
R4: library part RN73H1JTTD2233D100, "RESISTOR THIN FILM", Device Package="0603 (1608 Metric)", Manufacturer="KOA Speer Electronics, Inc.", Operating Temperature="-55°C ~ 155°C", Power (Watts)="0.1W, 1/10W", Ratings=AEC-Q200, Supplier Device Package=0603, Supplier Part Number 1=2019-RN73H1JTTD2233D100CT-ND, Temperature Coefficient=±100ppm/°C, Tolerance=±0.5%, ComponentLink2Description="DigiKey Link", ComponentLink2URL=http://digikey.com/product-detail/en/koa-speer-electronics-inc/RN73H1JTTD2233D100/2019-RN73H1JTTD2233D100CT-ND/10707088, Composition="Metal Film", Features="Automotive AEC-Q200, Moisture Resistant", Height - Seated (Max)="0.022\" (0.55mm)", LastUpdated="18/01/2020 19:43:55", Lifecycle Status=Active, Minimum Order=1, Number of Terminations=2, Package / Case="0603 (1608 Metric)", Packaging=TapeAndReel, Part Number=RN73H1JTTD2233D100, Part Status=Active, PartId=26816, Price=0.06, Resistance="223 kOhms", Series=RN73H, Size / Dimension="0.063\" L x 0.031\" W (1.60mm x 0.80mm)", Supplier 1=DigiKey
R5: library part ERJ-3EKF1693V, "RES SMD 169K OHM 1% 1/10W 0603", Device Package="0603 (1608 Metric)", Manufacturer="Panasonic Electronic Components", Operating Temperature="-55°C ~ 155°C", Power (Watts)="0.1W, 1/10W", Ratings=AEC-Q200, Supplier Device Package=0603, Supplier Part Number 1=P169KHCT-ND, Temperature Coefficient=±100ppm/°C, Tolerance=±1%, ComponentLink1Description=Datasheet, ComponentLink1URL=https://industrial.panasonic.com/cdbs/www-data/pdf/RDA0000/AOA0000C304.pdf, ComponentLink2Description="DigiKey Link", ComponentLink2URL=http://digikey.com/product-detail/en/panasonic-electronic-components/ERJ-3EKF1693V/P169KHCT-ND/198194, Composition="Thick Film", Features="Automotive AEC-Q200", Height - Seated (Max)="0.022\" (0.55mm)", LastUpdated="18/01/2020 19:44:29", Lifecycle Status=Active, Minimum Order=1, Number of Terminations=2, Package / Case="0603 (1608 Metric)", Packaging=TapeAndReel, Part Number=ERJ-3EKF1693V, Part Status=Active, PartId=13993, Price=0.01, Resistance="169 kOhms", Series=ERJ, Size / Dimension="0.063\" L x 0.031\" W (1.60mm x 0.80mm)", Supplier 1=DigiKey
R6: library part ERJ-3EKF2053V, "RES SMD 205K OHM 1% 1/10W 0603", Device Package="0603 (1608 Metric)", Manufacturer="Panasonic Electronic Components", Operating Temperature="-55°C ~ 155°C", Power (Watts)="0.1W, 1/10W", Ratings=AEC-Q200, Supplier Device Package=0603, Supplier Part Number 1=P205KHCT-ND, Temperature Coefficient=±100ppm/°C, Tolerance=±1%, ComponentLink1Description=Datasheet, ComponentLink1URL=https://industrial.panasonic.com/cdbs/www-data/pdf/RDA0000/AOA0000C304.pdf, ComponentLink2Description="DigiKey Link", ComponentLink2URL=http://digikey.com/product-detail/en/panasonic-electronic-components/ERJ-3EKF2053V/P205KHCT-ND/198243, Composition="Thick Film", Features="Automotive AEC-Q200", Height - Seated (Max)="0.022\" (0.55mm)", LastUpdated="19/01/2020 00:07:17", Lifecycle Status=Active, Minimum Order=1, Number of Terminations=2, Package / Case="0603 (1608 Metric)", Packaging=TapeAndReel, Part Number=ERJ-3EKF2053V, Part Status=Active, PartId=24171, Price=0.01, Resistance="205 kOhms", Series=ERJ, Size / Dimension="0.063\" L x 0.031\" W (1.60mm x 0.80mm)", Supplier 1=DigiKey
R7 R12: library part ERJ-3EKF2872V, "RES SMD 28.7K OHM 1% 1/10W 0603", Device Package="0603 (1608 Metric)", Manufacturer="Panasonic Electronic Components", Operating Temperature="-55°C ~ 155°C", Power (Watts)="0.1W, 1/10W", Ratings=AEC-Q200, Supplier Device Package=0603, Supplier Part Number 1=P28.7KHCT-ND, Temperature Coefficient=±100ppm/°C, Tolerance=±1%, ComponentLink1Description=Datasheet, ComponentLink1URL=https://industrial.panasonic.com/cdbs/www-data/pdf/RDA0000/AOA0000C304.pdf, ComponentLink2Description="DigiKey Link", ComponentLink2URL=http://digikey.com/product-detail/en/panasonic-electronic-components/ERJ-3EKF2872V/P28.7KHCT-ND/198297, Composition="Thick Film", Features="Automotive AEC-Q200", Height - Seated (Max)="0.022\" (0.55mm)", LastUpdated="19/01/2020 00:07:11", Lifecycle Status=Active, Minimum Order=1, Number of Terminations=2, Package / Case="0603 (1608 Metric)", Packaging=TapeAndReel, Part Number=ERJ-3EKF2872V, Part Status=Active, PartId=26015, Price=0.01, Resistance="28.7 kOhms", Series=ERJ, Size / Dimension="0.063\" L x 0.031\" W (1.60mm x 0.80mm)", Supplier 1=DigiKey
R8: library part ERJ-3EKF4023V, "RES SMD 402K OHM 1% 1/10W 0603", Device Package="0603 (1608 Metric)", Manufacturer="Panasonic Electronic Components", Operating Temperature="-55°C ~ 155°C", Power (Watts)="0.1W, 1/10W", Ratings=AEC-Q200, Supplier Device Package=0603, Supplier Part Number 1=P402KHCT-ND, Temperature Coefficient=±100ppm/°C, Tolerance=±1%, ComponentLink1Description=Datasheet, ComponentLink1URL=https://industrial.panasonic.com/cdbs/www-data/pdf/RDA0000/AOA0000C304.pdf, ComponentLink2Description="DigiKey Link", ComponentLink2URL=http://digikey.com/product-detail/en/panasonic-electronic-components/ERJ-3EKF4023V/P402KHCT-ND/198377, Composition="Thick Film", Features="Automotive AEC-Q200", Height - Seated (Max)="0.022\" (0.55mm)", LastUpdated="19/01/2020 00:07:17", Lifecycle Status=Active, Minimum Order=1, Number of Terminations=2, Package / Case="0603 (1608 Metric)", Packaging=TapeAndReel, Part Number=ERJ-3EKF4023V, Part Status=Active, PartId=24104, Price=0.01, Resistance="402 kOhms", Series=ERJ, Size / Dimension="0.063\" L x 0.031\" W (1.60mm x 0.80mm)", Supplier 1=DigiKey
R9: library part ERJ-3EKF1001V, "RES SMD 1K OHM 1% 1/10W 0603", Device Package="0603 (1608 Metric)", Manufacturer="Panasonic Electronic Components", Operating Temperature="-55°C ~ 155°C", Power (Watts)="0.1W, 1/10W", Ratings=AEC-Q200, Supplier Device Package=0603, Supplier Part Number 1=P1.00KHCT-ND, Temperature Coefficient=±100ppm/°C, Tolerance=±1%, ComponentLink1Description=Datasheet, ComponentLink1URL=https://industrial.panasonic.com/cdbs/www-data/pdf/RDA0000/AOA0000C304.pdf, ComponentLink2Description="DigiKey Link", ComponentLink2URL=http://digikey.com/product-detail/en/panasonic-electronic-components/ERJ-3EKF1001V/P1.00KHCT-ND/198071, Composition="Thick Film", Features="Automotive AEC-Q200", Height - Seated (Max)="0.022\" (0.55mm)", LastUpdated="19/01/2020 00:07:12", Lifecycle Status=Active, Minimum Order=1, Number of Terminations=2, Package / Case="0603 (1608 Metric)", Packaging=TapeAndReel, Part Number=ERJ-3EKF1001V, Part Status=Active, PartId=25687, Price=0.01, Resistance="1 kOhms", Series=ERJ, Size / Dimension="0.063\" L x 0.031\" W (1.60mm x 0.80mm)", Supplier 1=DigiKey
R10: library part ERJ-3BQF3R0V, "RES SMD 3 OHM 1% 1/4W 0603", Device Package="0603 (1608 Metric)", Manufacturer="Panasonic Electronic Components", Operating Temperature="-55°C ~ 125°C", Power (Watts)="0.25W, 1/4W", Ratings=AEC-Q200, Supplier Device Package=0603, Supplier Part Number 1=P17381CT-ND, Temperature Coefficient=±200ppm/°C, Tolerance=±1%, ComponentLink1Description=Datasheet, ComponentLink1URL=https://industrial.panasonic.com/cdbs/www-data/pdf/RDN0000/AOA0000C313.pdf, ComponentLink2Description="DigiKey Link", ComponentLink2URL=http://digikey.com/product-detail/en/panasonic-electronic-components/ERJ-3BQF3R0V/P17381CT-ND/5647865, Composition="Thick Film", Features="Automotive AEC-Q200, Current Sense", Height - Seated (Max)="0.022\" (0.55mm)", LastUpdated="19/01/2020 08:05:22", Lifecycle Status=Active, Minimum Order=1, Number of Terminations=2, Package / Case="0603 (1608 Metric)", Packaging=TapeAndReel, Part Number=ERJ-3BQF3R0V, Part Status=Active, PartId=781, Price=0.04, Resistance="3 Ohms", Series=ERJ, Size / Dimension="0.063\" L x 0.031\" W (1.60mm x 0.80mm)", Supplier 1=DigiKey
R11: library part ERJ-3EKF1623V, "RES SMD 162K OHM 1% 1/10W 0603", Device Package="0603 (1608 Metric)", Manufacturer="Panasonic Electronic Components", Operating Temperature="-55°C ~ 155°C", Power (Watts)="0.1W, 1/10W", Ratings=AEC-Q200, Supplier Device Package=0603, Supplier Part Number 1=P162KHCT-ND, Temperature Coefficient=±100ppm/°C, Tolerance=±1%, ComponentLink1Description=Datasheet, ComponentLink1URL=https://industrial.panasonic.com/cdbs/www-data/pdf/RDA0000/AOA0000C304.pdf, ComponentLink2Description="DigiKey Link", ComponentLink2URL=http://digikey.com/product-detail/en/panasonic-electronic-components/ERJ-3EKF1623V/P162KHCT-ND/198190, Composition="Thick Film", Features="Automotive AEC-Q200", Height - Seated (Max)="0.022\" (0.55mm)", LastUpdated="19/01/2020 00:07:21", Lifecycle Status=Active, Minimum Order=1, Number of Terminations=2, Package / Case="0603 (1608 Metric)", Packaging=TapeAndReel, Part Number=ERJ-3EKF1623V, Part Status=Active, PartId=23159, Price=0.01, Resistance="162 kOhms", Series=ERJ, Size / Dimension="0.063\" L x 0.031\" W (1.60mm x 0.80mm)", Supplier 1=DigiKey

## Free pads (board coordinates)
  round 7 hole 3.5: M(4,35.25) M(26.5,35.25)

## Via types
v1: diameter 1, hole 0.6, Top Layer to Bottom Layer, 32 vias
v2: diameter 0.5, hole 0.2, Top Layer to Bottom Layer, 5 vias
v3: diameter 0.8, hole 0.4, Top Layer to Bottom Layer, 3 vias

## Nets (pads, with @x,y where several pads share a name; then routed paths per layer and width w, separated by ;. In a path a pad name is that pad's centre, name@x,y a point inside that pad or via, vN(x,y) a via of type N, cw(c..) or ccw(c..) an arc to the next point about the centre after c; other vN are vias at no path point)
2.75V: C1.1 C2.2 C5.1 C6.2 C13.2 C14.2 C15.2 IC1.5 IC2.5 IC3.5 IC4.2 R4.2 | length 63.6
  Top Layer w0.3: v1(21.75,15.75) C13.2 23.075,16.85 IC3.5@22.625,17.3 ; IC3.5 IC3.5@22.625,17.3 ; R4.2 24.325,20.675 24.325,19.825 23.75,19.25 23.75,18.65 22.75,17.65 22.75,17.425 IC3.5@22.625,17.3
  Top Layer w0.5: v1(9.25,32.25) 10.69,32.25 C1.1 10.75,32.595 11.28,33.125 12.3,33.125 C2.2 12.7,33.125 13.165,33.125 13.74,32.55 IC2.5 ; 13,23.216 13,23.5 12.5,24 C6.2 12.55,25.325 13.025,24.85 IC1.5@13.825,24.85 ; v1(13.75,25.7) 13.825,25.625 IC1.5@13.825,24.85 ; IC1.5 13.875,24.8 IC1.5@13.825,24.85 ; IC4.2 25.125,28.275 25.9,28.275 ; C14.2 26.7,27.425 25.9,28.225 25.9,28.275 ; v1(28.5,29) 26.825,29 C15.2 26.7,29.075 25.9,28.275
  Bottom Layer w0.3: v1(9.25,32.25) 11.5,32.25 12.75,31 12.75,26.7 v1(13.75,25.7) 13.75,22.5 20.5,15.75 v1(21.75,15.75) 23.25,15.75 28.5,21 v1(28.5,29)
12V: C11.2 C20.2 C21.2 C22.2 D1.2 D2.2 IC5.2 J1.1 L1.1 R6.2 R11.1 | length 83.6
  Top Layer w0.254: v3(1.5,14.25) R11.1 ; R6.2@4,27.15 R6.2 4.85,27.15 ; 5.1,27.15 5.5,26.75 5.5,26.149 5.649,26 6.575,26 C20.2 ; IC5.2 6.25,24.75 6.75,25.25 C20.2 ; C22.2 8.325,25.75 ; C21.2 8.325,25.75 ; C20.2 8.25,25.825 8.325,25.75
  Top Layer w0.5: D1.2@16.8,37.95 16.8,36.55 16.825,36.525 18.225,36.525 v1(18.25,36.5)
  Top Layer w1: D2.2 16.475,15.705 16.475,13.264 J1.1 ; v1(25.5,13) 26.675,13 C11.2 L1.1@26.75,14
  Bottom Layer w0.254: v3(1.5,14.25) 0.75,15 0.75,25.5 1.25,26 v1(5.5,26)
  Bottom Layer w0.5: v1(18.25,36.5) 11,36.5 5.5,31 v1(5.5,26) 10.25,26 11.25,25 11.25,22 16.52,16.73 J1.1 16.739,13 v1(25.5,13)
-2.75V: C3.2 C4.1 C7.2 C8.1 C16.2 C17.2 IC1.2 IC2.2 IC4.1 | length 33.6
  Top Layer w0.5: IC2.2 16.61,33.45 17.875,33.45 C4.1 19.385,33.325 19.75,32.96 C3.2 19.94,33 v1(21.25,33) ; IC1.2 16.65,25.7 17.575,25.7 17.95,25.325 C8.1 18,24.25 17.5,23.75 C7.2 17.69,22.75 v1(19,22.75) ; C17.2 C16.2 v1(25.75,24.25) ; C17.2@24.675,26 25.1,26.425 IC4.1
  Bottom Layer w0.3: v1(19,22.75) 20.798,22.75 21.398,23.35 24.85,23.35 v1(25.75,24.25) 25.75,28.5 v1(21.25,33)
AMP1OUT: C10.1 IC2.1 R1.1 R3.2 | length 4.9
  Top Layer w0.5: R1.1 R3.2 15.912,29.512 15.912,30.987 C10.1 16.125,31.2 16.125,32.115 16.31,32.3 16.31,32.5 16.36,32.55 IC2.1
AMP2IN: C9.1 IC1.4 R1.2 R2.1 | length 7.1
  Top Layer w0.5: IC1.4 IC1.4@14.1,26.7 ; C9.1 14.587,21.762 14.587,23.237 R2.1 14.775,23.425 14.775,24.239 14.85,24.314 14.85,25.286 14.818,25.318 14.818,25.982 IC1.4@14.1,26.7 ; R1.2 14.5,27.9 14.5,27.1 IC1.4@14.1,26.7
AMP2OUT: C9.2 IC1.1 J3.1 R2.2 | length 22
  Top Layer w0.5: IC1.1 16.4,24.8 16.075,24.475 16.075,23.425 R2.2 15.912,23.237 15.912,21.763 C9.2 15.925,18.825 24,10.75 24.75,10.75 25.75,9.75 J3.1
BOOT: C19.2 IC5.1 | length 1.6
  Top Layer w0.254: IC5.1 8.275,23.55 C19.2
CFLY+: C18.2 IC4.5 | length 4.3
  Top Layer w0.3: IC4.5 23.05,27.3 23.25,27.5 23.25,29.62 23.075,29.795 C18.2
CFLY-: C18.1 IC4.3 | length 2.1
  Top Layer w0.3: C18.1 24.425,29.426 24.601,29.25 25.05,29.25 IC4.3
COMP: C24.1 IC5.8 | length 3.4
  Top Layer w0.254: C24.1 4.5,17.25 4.796,17.546 4.951,17.546 5.741,18.336 5.741,19.441 IC5.8
GND: C1.2 C2.1 C3.1 C4.2 C5.2 C6.1 C7.1 C8.2 C11.1 C12.1 C13.1 C14.1 C15.1 C16.1 C17.1 C20.1 C21.1 C22.1 C24.2 C25.1 D3.1 IC1.3 IC2.3 IC3.2 IC4.4 IC5.9 IC5.11 J1.2 J2.M J3.2 J3.M pad.M R5.1 R7.1 R8.1 R10.1 R12.1 | length 106.8
  Top Layer w0.254: R7.1@2.45,27.15 R7.1@2.5,27.15 ; R7.1@2.7,27.15 2.152,26.602 2.102,26.602 1.75,26.25 v1(1.75,22) R12.1 5,20.9 v2(5.15,21.05) IC5.11@5.6,21.5 ; R7.1 v1(2.75,28.5) ; R8.1 4.75,22.35 v2(5.15,21.95) IC5.11@5.6,21.5 ; v1(4.5,14) C24.2 ; C24.2@4.75,15.325 5.815,15.325 ; D3.1@6.65,14.04 R10.1 v1(8,12.5) ; D3.1 D3.1@6.75,14.39 ; v1(6.75,28.5) C20.1 7.073,27.498 9.343,27.498 9.425,27.58 ; v1(9.25,29.5) 10.56,29.5 C1.2 ; C21.1@9.675,26.55 C21.1 C22.1 10.25,25 10.5,24.75 10.5,21.44 6.74,21.44 v2(6.35,21.05) ; C21.1@9.675,26.675 9.675,27.33 9.425,27.58 ; C21.1@9.75,26.675 C6.1 12.478,26.697 v1(11.145,26.697) ; C1.2@11,29.155 9.425,27.58 ; v1(11.5,19.75) 12.299,19.75 ; C5.2@12.94,19.75 12.299,19.75 ; C7.1 17.69,19.75 v1(19,19.75) ; C3.1 19.94,30 20.19,30.25 v1(21.25,30.25) ; IC5.11@5.6,21.5 v2(5.75,21.5) 6.2,21.95 v2(6.35,21.95) v2(6.35,21.05) ; 5.815,15.325 5.75,15.39 5.75,17.662 6.25,18.162 IC5.9 6.25,20.95 v2(6.35,21.05) ; 5.815,15.325 D3.1@6.75,14.39 ; D3.1@6.75,14.39 6.75,15.25 7.75,16.25 11.75,16.25 12.5,17 12.5,19.549 12.299,19.75
  Top Layer w0.5: v1(11.25,34.75) 11.288,34.712 12.463,34.712 C2.1 ; C5.2@12.94,19.75 12.94,19.465 15,17.405 15,14.532 13.98,13.512 J1.2 ; IC2.3 16.61,34.5 17.825,34.5 C4.2 18.037,34.712 19.212,34.712 v1(19.25,34.75) ; IC1.3 16.612,26.687 17.988,26.687 C8.2 ; v1(19.25,26.75) 19.212,26.712 18.038,26.712 C8.2 ; C3.1 19.75,29.905 18,28.155 C8.2 ; v1(21.25,30.25) 21.25,30.125 22.175,29.2 IC4.4 ; v1(21.75,22.5) R5.1 ; v1(21.75,24.25) C16.1 C17.1 v1(21.75,25.75) ; v1(23.75,5.25) J3.2 ; v1(24.25,14.5) 24.338,14.587 24.338,15.663 C13.1 ; IC3.2 25.125,18.275 25.775,18.275 26.25,18.75 27.075,18.75 C12.1 27.288,18.963 28.463,18.963 v1(28.5,19) ; v1(25.5,11.5) 25.538,11.538 26.712,11.538 C11.1 ; C14.1 26.787,26.038 26.787,24.823 v1(26.823,24.787) ; C15.1 26.75,31.75 v1(28,30.5)
IADJ: C25.2 IC5.6 R11.2 R12.2 | length 8.2
  Top Layer w0.254: R11.2@1.75,16.65 1.75,18.25 2,18.5 ; C25.2 3.225,19.6 R12.2 1.75,18.75 2,18.5 ; IC5.6 4.75,18.75 4.5,18.5 2,18.5
ISENSE: IC5.7 R9.2 | length 4.2
  Top Layer w0.254: R9.2@3.25,16.65 3.25,17.5 3.75,18 4.675,18 5.241,18.567 5.241,19.441 IC5.7
LED_VCC: C23.2 D2.1 J2.1 L2.2 | length 14.2
  Top Layer w0.254: J2.1@6.75,7.5 J2.1 6.75,10.625 6.425,10.95 C23.2 8,11 9.75,12.75 L2.2@9.75,14.3 ; L2.2@9.75,15.05 L2.2@9.75,14.3 ; L2.2@10,14.55 L2.2@9.75,14.3 ; L2.2@10.056,15 12.948,15 13.097,15.149 13.097,15.277 D2.1
LED_VSS: C23.1 J2.2 R9.1 R10.2 | length 8.8
  Top Layer w0.254: R9.1 3,14.3 4.8,12.5 4.8,11.275 C23.1 5.075,10.95 4.75,10.625 J2.2 J2.2@4.75,7.5
PDOUT: C10.2 D1.1 IC2.4 R3.1 | length 9.4
  Top Layer w0.5: D1.1@13.7,37.95 13.7,36.55 13.7,34.5 13.75,34.45 IC2.4 14.14,34.45 14.89,33.7 14.89,32.064 14.5,31.674 14.5,31.075 C10.2 14.587,30.987 14.587,29.512 R3.1
PH: C19.1 D3.2 IC5.10 L2.1 | length 11.9
  Top Layer w0.254: IC5.10 IC5.10@6.75,18.835 ; v3(7.5,18.75) 7.437,18.813 6.771,18.813 IC5.10@6.75,18.835 ; C19.1 9.75,23.425 v3(9.75,22.5) ; L2.1@9.95,17.25 6.75,17.25 IC5.10@6.75,18.835
  Bottom Layer w0.254: v3(7.5,18.75) 9.75,21 v3(9.75,22.5)
RT: IC5.5 R8.2 | length 3
  Top Layer w0.254: R8.2 3.25,24.25 3.5,24.5 4.488,24.5 4.75,24.238 IC5.5
UVLO: IC5.3 R6.1 R7.2 | length 4.5
  Top Layer w0.254: R7.2 R6.1 4.548,25.552 4.623,25.552 5.741,24.433 5.741,23.559 IC5.3
VIN_FILT: C12.2 IC3.1 IC3.3 L1.2 | length 7.8
  Top Layer w0.3: IC3.3 24.975,19.075 24.426,19.075 24.25,18.899 24.25,17.426 24.426,17.25 25.05,17.25 IC3.1 26.975,17.3 C12.2 27.25,16 27.1,15.85 L1.2
VREG_FB: IC3.4 R4.1 R5.2 | length 4.3
  Top Layer w0.3: IC3.4 22.625,19.2 23.1,19.675 R4.1 23.1,20.8 23.625,21.325 23.625,21.63 23.875,21.88 23.875,21.925 24.4,22.45 R5.2
pads on no net: FID1.F FID2.F IC5.4

## Polygon pours and split planes (outlines as drawn)
GND on Top Layer "GND_L01_P004" (solid, remove dead copper, pour order 4): 0,39.25 0,0 30.5,0 30.5,39.25
LED_VSS on Top Layer "LED_VSS_L01_P003" (solid, remove dead copper, pour order 3): 5.5,5.5 5,5 4,5 3.5,5.5 3.5,12 2.25,13.25 2.25,16 3.75,16 3.75,13.75 4.25,13.25 5.5,13.25 5.75,13 5.75,10.25 5.5,10
LED_VCC on Top Layer "LED_VCC_L01_P002" (solid, remove dead copper, pour order 2): 14.5,16.75 14.5,15 14,14.5 13,14.5 8,9.5 8,5.5 7.5,5 6.5,5 6,5.5 6,10 5.75,10.25 5.75,11.75 8.25,11.75 8.75,12.25 8.75,12.75 7.75,13.75 7.75,15.75 8,16 12,16 12.75,16.75
PH on Top Layer "PH_L01_P001" (solid, remove dead copper, pour order 1): 6.5,20.5 7.25,20.5 8.75,19 12.25,19 12.25,17 12,16.75 8,16.75 7.25,16 6,16 6,17.75 6.25,17.75 6.5,18
12V on Top Layer "12V_L01_P000" (solid, remove dead copper, pour order 0): 3.5,26.5 3.5,27.75 5.75,27.75 6,27.5 6,26.5 7.5,26.5 7.75,26.75 7.75,27.25 9,27.25 9,24.25 7.5,24.25 7,24.75 6.75,24.75 6.5,24.5 6.5,23 6,23 6,24.75 5,25.75 5,26.5
GND on Bottom Layer "GND_L02_P005" (solid, remove dead copper, pour order 5): 0,39.25 0,0 30.5,0 30.5,39.25

## Keep-outs
Keep-Out Layer:
  the board outline again, w0.2